# EAGLE board SparkFun WiFi Shield - DA16200-Panel (EAGLE 9.6.2), part 1 of 3
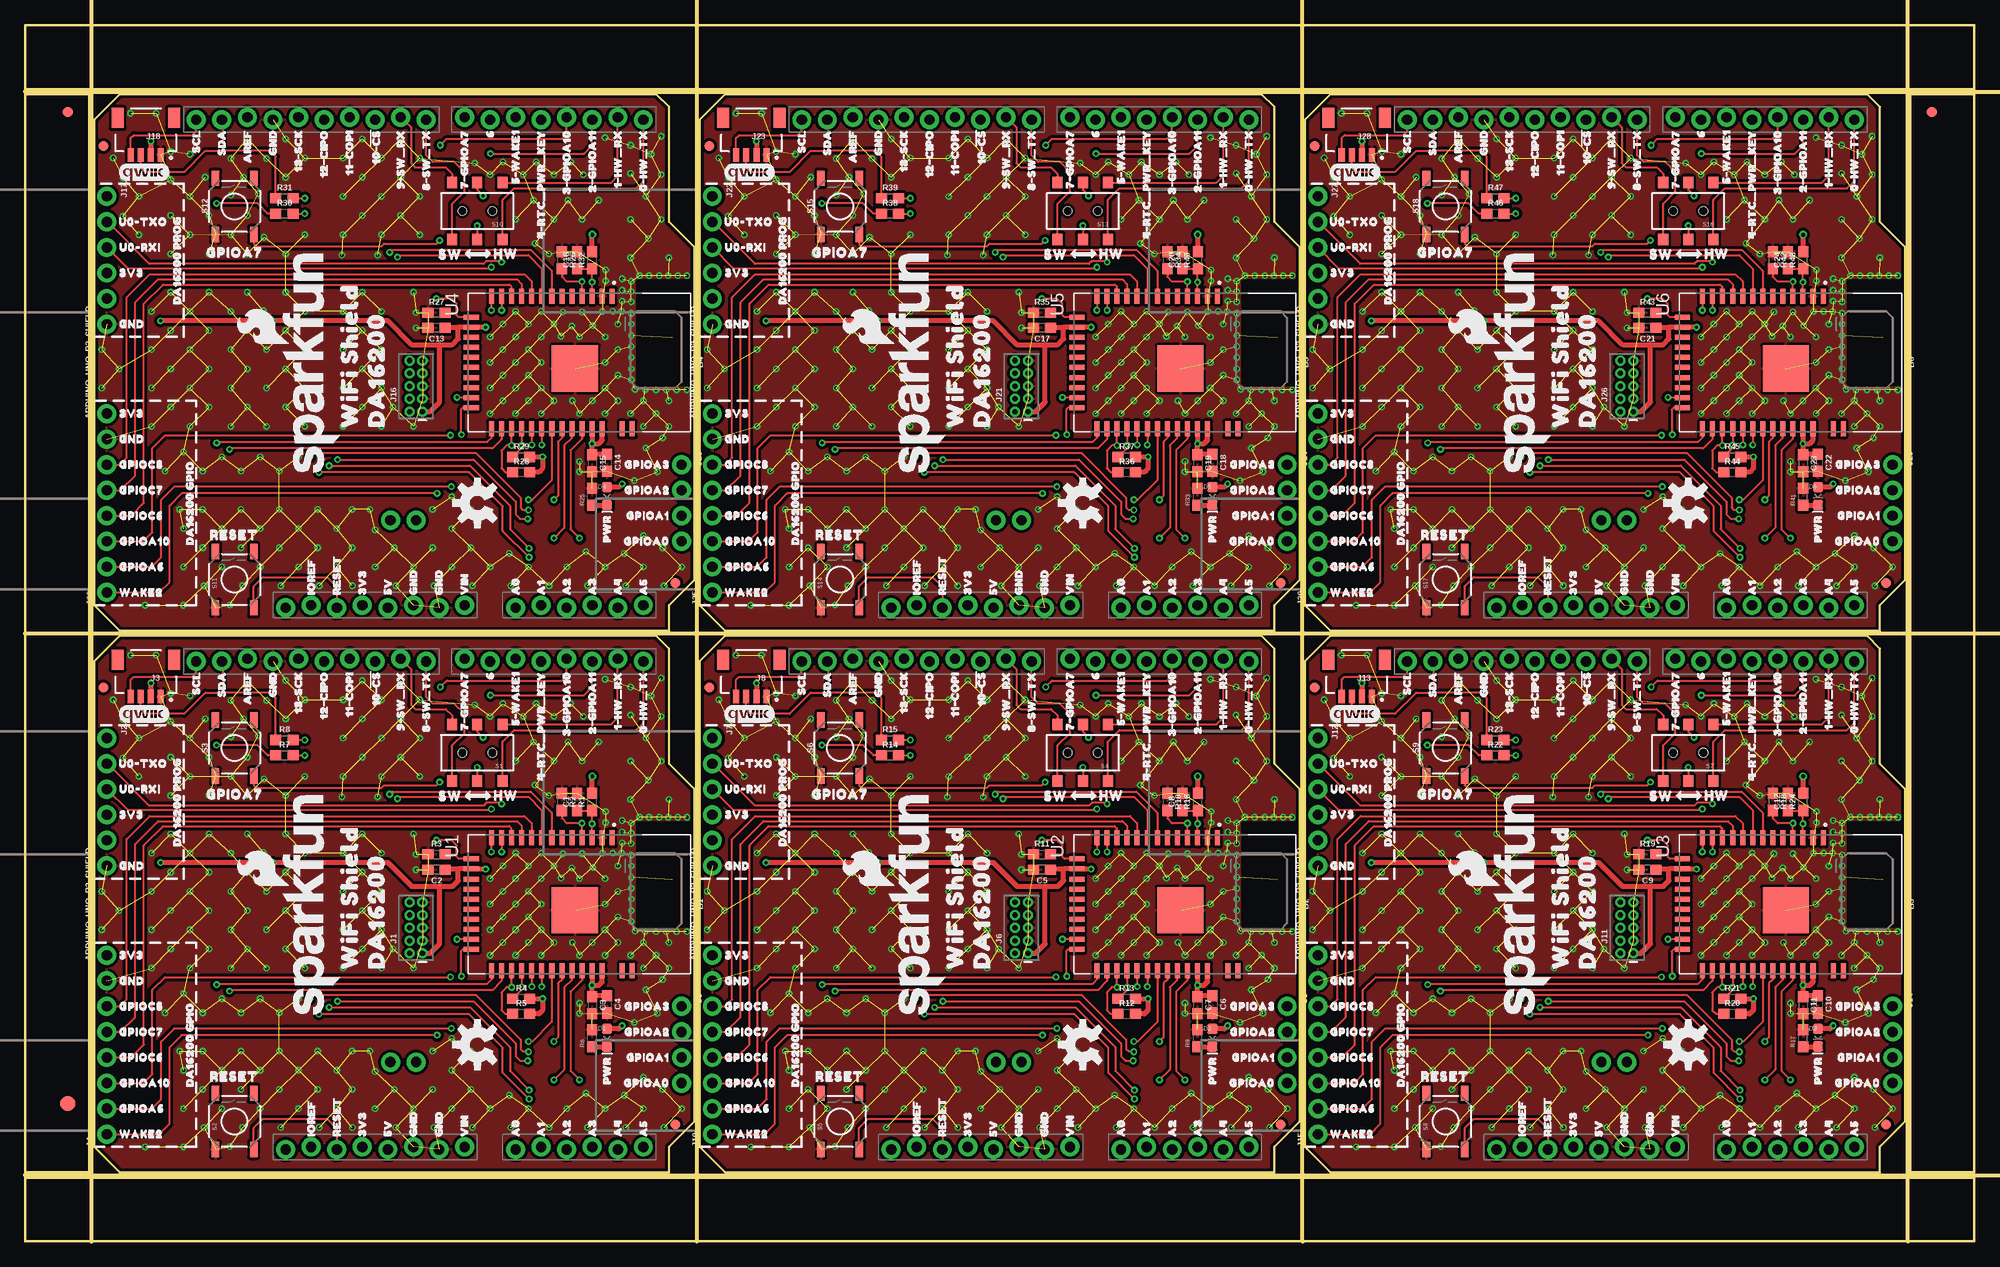
[diagram p0: board, top side]
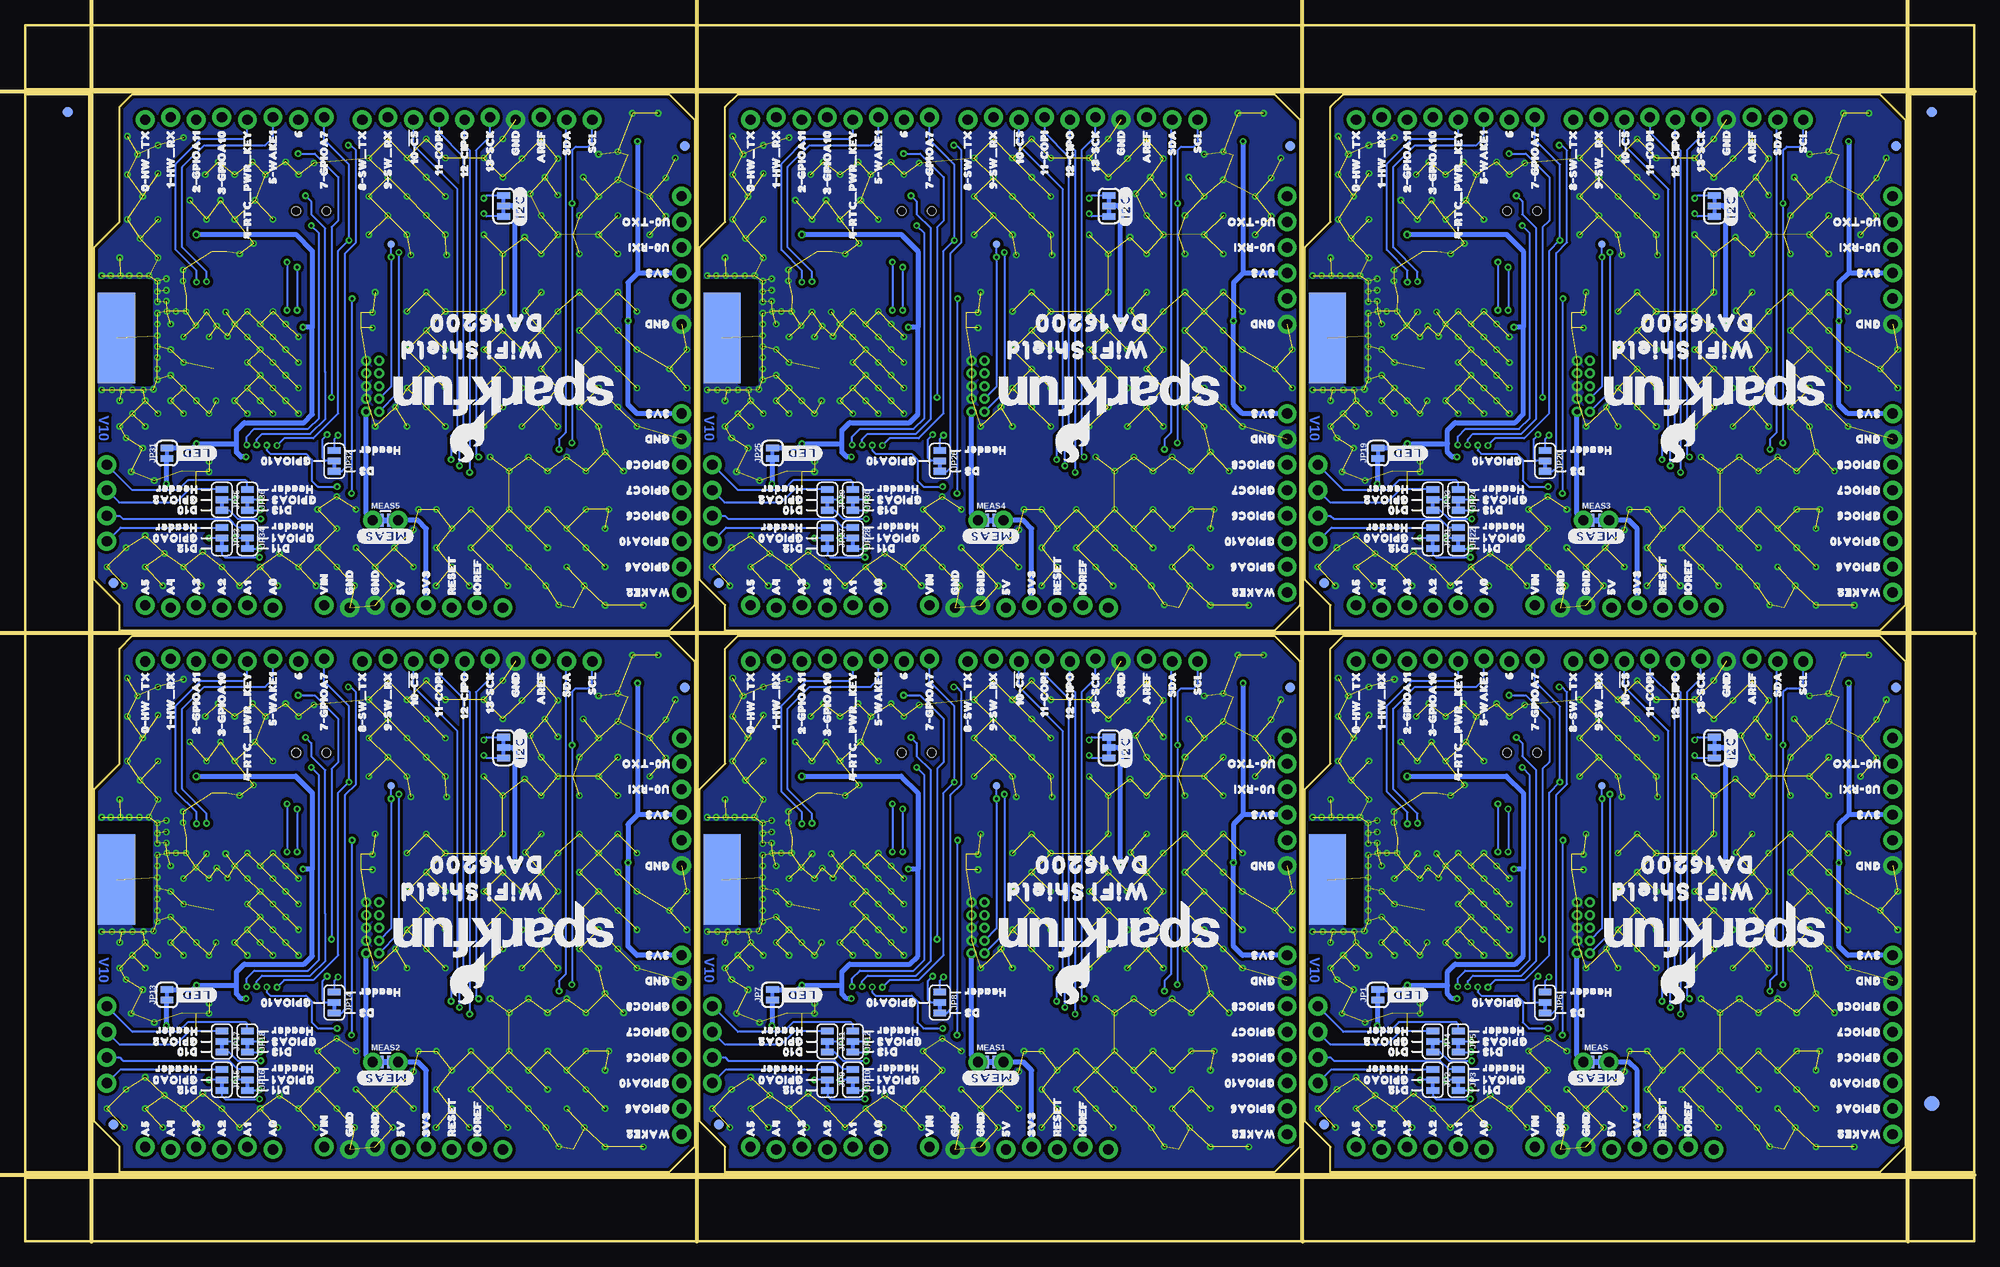
[diagram p1: board, bottom side, seen from below]

Size 193.8 x 120.9 mm. Coordinates in mm from the lower left corner, seen from the top.
Outline: 6.86,57.66 6.86,9.4 9.4,6.86 64.01,6.86 64.01,9.4 66.55,11.94 66.55,44.96 64.01,47.5 64.01,58.93 62.74,60.2 9.4,60.2 6.86,57.66
Outline: 67.06,57.66 67.06,9.4 69.6,6.86 124.21,6.86 124.21,9.4 126.75,11.94 126.75,44.96 124.21,47.5 124.21,58.93 122.94,60.2 69.6,60.2 67.06,57.66
Outline: 127.25,57.66 127.25,9.4 129.79,6.86 184.4,6.86 184.4,9.4 186.94,11.94 186.94,44.96 184.4,47.5 184.4,58.93 183.13,60.2 129.79,60.2 127.25,57.66
Outline: 6.86,111.51 6.86,63.25 9.4,60.71 64.01,60.71 64.01,63.25 66.55,65.79 66.55,98.81 64.01,101.35 64.01,112.78 62.74,114.05 9.4,114.05 6.86,111.51
Outline: 67.06,111.51 67.06,63.25 69.6,60.71 124.21,60.71 124.21,63.25 126.75,65.79 126.75,98.81 124.21,101.35 124.21,112.78 122.94,114.05 69.6,114.05 67.06,111.51
Outline: 127.25,111.51 127.25,63.25 129.79,60.71 184.4,60.71 184.4,63.25 186.94,65.79 186.94,98.81 184.4,101.35 184.4,112.78 183.13,114.05 129.79,114.05 127.25,111.51
Outline: 0,6.35 193.8,6.35 193.8,0 0,0 0,6.35
Outline: 187.45,114.05 193.8,114.05 193.8,6.86 187.45,6.86 187.45,114.05
Outline: 0,120.9 193.8,120.9 193.8,114.55 0,114.55 0,120.9
Outline: 0,114.05 6.35,114.05 6.35,6.86 0,6.86 0,114.05
Copper layers (1*16): Top 0.035mm / dielectric 1.5mm / Bottom 0.035mm
Design rules "SparkFun WiFi Shield - DA16200": minimum track width 7mil, minimum drill 0.3mm, track to track 7mil, track to pad 7mil, pad to pad 7mil, via to via 7mil, smd to smd 7mil, copper to edge 7mil, drill to drill 7mil, minimum pad ring 7mil, minimum via ring 7mil, stop-mask expansion 3mil, vias tented up to drill 25mil, thermal gap 10mil
Milling: 7 lines

## Footprints (pad centres in the part's own frame; a part is rotated, then mirrored left to right if it is on the bottom)
UNO_R3_SHIELD_NOLABELS_LOCK = drill 1.016 pad 1.88: 3.3V 24.13,-3.81; 5V 24.384,-1.27; A0 24.384,11.43; A1 24.13,13.97; A2 24.384,16.51; A3 24.13,19.05; A4 24.384,21.59; A5 24.13,24.13; AREF -24.384,-15.24; D2 -24.13,19.05; D3 -24.384,16.51; D4 -24.13,13.97; D5 -24.384,11.43; D6 -24.13,8.89; D7 -24.384,6.35; D8 -24.13,2.54; D9 -24.384,0; D10 -24.13,-2.54; D11 -24.384,-5.08; D12 -24.13,-7.62; D13 -24.384,-10.16; GND@0 24.13,1.27; GND@1 24.384,3.81; GND@2 -24.13,-12.7; IOREF 24.13,-8.89; NC 24.384,-11.43; RES 24.384,-6.35; RX -24.13,24.13; SCL -24.13,-20.32; SDA -24.13,-17.78; TX -24.384,21.59; VIN 24.13,6.35
0603 = smd 1.1 x 1: 1 -0.85,0; 2 0.85,0
LED-0603 = smd 1 x 1: A -0.877,0; C 0.877,0
FIDUCIAL-1X2 = smd 1 x 1: 1 0,0
FIDUCIAL-1.5X3 = smd 1.5 x 1.5: 1 0,0
SMT-JUMPER_3_2-NC_TRACE_SILK = smd 0.66 x 1.27: 1 -1.041,0; 2 0,0; 3 1.041,0
2X5-PTH-1.27MM-NO_SILK = drill 0.508 pad 1: 1 -2.54,-0.635; 2 -2.54,0.635; 3 -1.27,-0.635; 4 -1.27,0.635; 5 0,-0.635; 6 0,0.635; 7 1.27,-0.635; 8 1.27,0.635; 9 2.54,-0.635; 10 2.54,0.635
1X06_NO_SILK = drill 1.016 pad 1.88: 1 0,0; 2 2.54,0; 3 5.08,0; 4 7.62,0; 5 10.16,0; 6 12.7,0
JST04_1MM_RA = smd 0.6 x 1.35: 1 -1.5,0; 2 -0.5,0; 3 0.5,0; 4 1.5,0 | smd 1.2 x 2: NC1 2.8,-3.675; NC2 -2.8,-3.675
1X08_NO_SILK = drill 1.016 pad 1.88: 1 0,0; 2 2.54,0; 3 5.08,0; 4 7.62,0; 5 10.16,0; 6 12.7,0; 7 15.24,0; 8 17.78,0
1X04_NO_SILK = drill 1.016 pad 1.88: 1 0,0; 2 2.54,0; 3 5.08,0; 4 7.62,0
SMT-JUMPER_2_NC_TRACE_SILK = smd 0.66 x 1.27: 1 -0.521,0; 2 0.521,0
SMT-JUMPER_3_1-NC_TRACE_SILK = smd 0.66 x 1.27: 1 -1.041,0; 2 0,0; 3 1.041,0
COMBO-JUMPER_2_NC_TRACE = smd 0.635 x 1.27: 1 -0.508,0; 2 0.508,0 | drill 1.016 pad 1.88: 3 -1.27,0; 4 1.27,0
SWITCH_DPDT_SMD_AYZ0202 = smd 1 x 1.15: 1 -2.5,2.825; 2 0,2.825; 3 2.5,2.825; 4 -2.5,-2.825; 5 0,-2.825; 6 2.5,-2.825 | hole 0.85: 1.5,0; -1.5,0
TACTILE_SWITCH_SMD_5.2MM = smd 1.524 x 0.762: 1 -2.794,1.905; 2 2.794,1.905; 3 -2.794,-1.905; 4 2.794,-1.905
PAD.03X.03 = smd 0.762 x 0.762: 1 0,0
XCVR_DA16200MOD-AAC4WA32 = smd 1.5 x 0.5: 1 -6.6,3.25; 2 -6.6,2.25; 3 -6.6,1.25; 4 -6.6,0.25; 5 -6.6,-0.75; 6 -6.6,-1.75; 7 -6.6,-2.75; 8 -6.6,-3.75; 9 -6.6,-4.75; 10 -6.6,-5.75; 11 -6.6,-6.75; 12 -6.6,-7.75; 13 -6.6,-8.75; 24 6.6,-8.75; 25 6.6,-7.75; 26 6.6,-6.75; 27 6.6,-5.75; 28 6.6,-4.75; 29 6.6,-3.75; 30 6.6,-2.75; 31 6.6,-1.75; 32 6.6,-0.75; 33 6.6,0.25; 34 6.6,1.25; 35 6.6,2.25; 36 6.6,4.25; 37 6.6,5.25 | smd 0.5 x 1.5: 14 -4.5,-10.75; 15 -3.5,-10.75; 16 -2.5,-10.75; 17 -1.5,-10.75; 18 -0.5,-10.75; 19 0.5,-10.75; 20 1.5,-10.75; 21 2.5,-10.75; 22 3.5,-10.75; 23 4.5,-10.75 | smd 9 x 3.7 bottom: ANT_GND -2.45,9.2 | smd 4.6 x 4.6: GND 0.61,-0.45

## Placement (x,y rotation side)
B1  ARDUINO_UNO_R3_SHIELD  [UNO_R3_SHIELD_NOLABELS_LOCK]  37.34,33.53 270 top
B2  ARDUINO_UNO_R3_SHIELD  [UNO_R3_SHIELD_NOLABELS_LOCK]  97.54,33.53 270 top
B3  ARDUINO_UNO_R3_SHIELD  [UNO_R3_SHIELD_NOLABELS_LOCK]  157.73,33.53 270 top
B4  ARDUINO_UNO_R3_SHIELD  [UNO_R3_SHIELD_NOLABELS_LOCK]  37.34,87.38 270 top
B5  ARDUINO_UNO_R3_SHIELD  [UNO_R3_SHIELD_NOLABELS_LOCK]  97.54,87.38 270 top
B6  ARDUINO_UNO_R3_SHIELD  [UNO_R3_SHIELD_NOLABELS_LOCK]  157.73,87.38 270 top
C1  DNP  [0603]  54.86,43.69 90 top
C2  1uF  [0603]  40.89,36.96 180 top
C3  1uF  [0603]  56.38,23.5 270 top
C4  10uF  [0603]  57.85,23.56 270 top
C5  1uF  [0603]  101.09,36.96 180 top
C6  10uF  [0603]  118.05,23.56 270 top
C7  1uF  [0603]  116.57,23.5 270 top
C8  DNP  [0603]  115.06,43.69 90 top
C9  1uF  [0603]  161.29,36.96 180 top
C10  10uF  [0603]  178.24,23.56 270 top
C11  1uF  [0603]  176.77,23.5 270 top
C12  DNP  [0603]  175.26,43.69 90 top
C13  1uF  [0603]  40.89,90.81 180 top
C14  10uF  [0603]  57.85,77.41 270 top
C15  1uF  [0603]  56.38,77.34 270 top
C16  DNP  [0603]  54.86,97.54 90 top
C17  1uF  [0603]  101.09,90.81 180 top
C18  10uF  [0603]  118.05,77.41 270 top
C19  1uF  [0603]  116.57,77.34 270 top
C20  DNP  [0603]  115.06,97.54 90 top
C21  1uF  [0603]  161.29,90.81 180 top
C22  10uF  [0603]  178.24,77.41 270 top
C23  1uF  [0603]  176.77,77.34 270 top
C24  DNP  [0603]  175.26,97.54 90 top
D1  RED  [LED-0603]  57.85,20.26 270 top
D2  RED  [LED-0603]  118.05,20.26 270 top
D3  RED  [LED-0603]  178.24,20.26 270 top
D4  RED  [LED-0603]  57.85,74.1 270 top
D5  RED  [LED-0603]  118.05,74.1 270 top
D6  RED  [LED-0603]  178.24,74.1 270 top
E$1  [FIDUCIAL-1X2]  4.23,112.27 0 top
E$2  [FIDUCIAL-1X2]  4.23,112.27 0 bottom
E$3  [FIDUCIAL-1X2]  189.57,112.27 0 top
E$4  [FIDUCIAL-1X2]  189.57,112.27 0 bottom
E$5  [FIDUCIAL-1.5X3]  4.23,13.72 0 top
E$6  [FIDUCIAL-1.5X3]  4.23,13.72 0 bottom
FD1  FIDUCIAL1X2  [FIDUCIAL-1X2]  7.81,55.05 0 top
FD2  FIDUCIAL1X2  [FIDUCIAL-1X2]  7.81,55.05 0 bottom
FD3  FIDUCIAL1X2  [FIDUCIAL-1X2]  64.64,11.62 0 top
FD4  FIDUCIAL1X2  [FIDUCIAL-1X2]  64.64,11.62 0 bottom
FD5  FIDUCIAL1X2  [FIDUCIAL-1X2]  68.01,55.05 0 top
FD6  FIDUCIAL1X2  [FIDUCIAL-1X2]  68.01,55.05 0 bottom
FD7  FIDUCIAL1X2  [FIDUCIAL-1X2]  124.84,11.62 0 top
FD8  FIDUCIAL1X2  [FIDUCIAL-1X2]  124.84,11.62 0 bottom
FD9  FIDUCIAL1X2  [FIDUCIAL-1X2]  128.21,55.05 0 top
FD10  FIDUCIAL1X2  [FIDUCIAL-1X2]  128.21,55.05 0 bottom
FD11  FIDUCIAL1X2  [FIDUCIAL-1X2]  185.04,11.62 0 top
FD12  FIDUCIAL1X2  [FIDUCIAL-1X2]  185.04,11.62 0 bottom
FD13  FIDUCIAL1X2  [FIDUCIAL-1X2]  7.81,108.9 0 top
FD14  FIDUCIAL1X2  [FIDUCIAL-1X2]  7.81,108.9 0 bottom
FD15  FIDUCIAL1X2  [FIDUCIAL-1X2]  64.64,65.47 0 top
FD16  FIDUCIAL1X2  [FIDUCIAL-1X2]  64.64,65.47 0 bottom
FD17  FIDUCIAL1X2  [FIDUCIAL-1X2]  68.01,108.9 0 top
FD18  FIDUCIAL1X2  [FIDUCIAL-1X2]  68.01,108.9 0 bottom
FD19  FIDUCIAL1X2  [FIDUCIAL-1X2]  124.84,65.47 0 top
FD20  FIDUCIAL1X2  [FIDUCIAL-1X2]  124.84,65.47 0 bottom
FD21  FIDUCIAL1X2  [FIDUCIAL-1X2]  128.21,108.9 0 top
FD22  FIDUCIAL1X2  [FIDUCIAL-1X2]  128.21,108.9 0 bottom
FD23  FIDUCIAL1X2  [FIDUCIAL-1X2]  185.04,65.47 0 top
FD24  FIDUCIAL1X2  [FIDUCIAL-1X2]  185.04,65.47 0 bottom
I2C  [SMT-JUMPER_3_2-NC_TRACE_SILK]  25.84,49.09 270 bottom
I2C1  [SMT-JUMPER_3_2-NC_TRACE_SILK]  86.04,49.09 270 bottom
I2C2  [SMT-JUMPER_3_2-NC_TRACE_SILK]  146.24,49.09 270 bottom
I2C3  [SMT-JUMPER_3_2-NC_TRACE_SILK]  25.84,102.93 270 bottom
I2C4  [SMT-JUMPER_3_2-NC_TRACE_SILK]  86.04,102.93 270 bottom
I2C5  [SMT-JUMPER_3_2-NC_TRACE_SILK]  146.24,102.93 270 bottom
J1  CORTEX_JTAG_DEBUG  [2X5-PTH-1.27MM-NO_SILK]  38.86,31.18 90 top
J2  [1X06_NO_SILK]  8.13,50.04 270 top
J3  QWIIC_RA  [JST04_1MM_RA]  12,54.17 180 top
J4  [1X08_NO_SILK]  8.13,10.67 90 top
J5  [1X04_NO_SILK]  65.28,23.37 270 top
J6  CORTEX_JTAG_DEBUG  [2X5-PTH-1.27MM-NO_SILK]  99.06,31.18 90 top
J7  [1X06_NO_SILK]  68.33,50.04 270 top
J8  QWIIC_RA  [JST04_1MM_RA]  72.2,54.17 180 top
J9  [1X04_NO_SILK]  125.48,23.37 270 top
J10  [1X08_NO_SILK]  68.33,10.67 90 top
J11  CORTEX_JTAG_DEBUG  [2X5-PTH-1.27MM-NO_SILK]  159.26,31.18 90 top
J12  [1X06_NO_SILK]  128.52,50.04 270 top
J13  QWIIC_RA  [JST04_1MM_RA]  132.4,54.17 180 top
J14  [1X04_NO_SILK]  185.67,23.37 270 top
J15  [1X08_NO_SILK]  128.52,10.67 90 top
J16  CORTEX_JTAG_DEBUG  [2X5-PTH-1.27MM-NO_SILK]  38.86,85.03 90 top
J17  [1X06_NO_SILK]  8.13,103.89 270 top
J18  QWIIC_RA  [JST04_1MM_RA]  12,108.01 180 top
J19  [1X04_NO_SILK]  65.28,77.22 270 top
J20  [1X08_NO_SILK]  8.13,64.52 90 top
J21  CORTEX_JTAG_DEBUG  [2X5-PTH-1.27MM-NO_SILK]  99.06,85.03 90 top
J22  [1X06_NO_SILK]  68.33,103.89 270 top
J23  QWIIC_RA  [JST04_1MM_RA]  72.2,108.01 180 top
J24  [1X04_NO_SILK]  125.48,77.22 270 top
J25  [1X08_NO_SILK]  68.33,64.52 90 top
J26  CORTEX_JTAG_DEBUG  [2X5-PTH-1.27MM-NO_SILK]  159.26,85.03 90 top
J27  [1X06_NO_SILK]  128.52,103.89 270 top
J28  QWIIC_RA  [JST04_1MM_RA]  132.4,108.01 180 top
J29  [1X04_NO_SILK]  185.67,77.22 270 top
J30  [1X08_NO_SILK]  128.52,64.52 90 top
JP1  [SMT-JUMPER_2_NC_TRACE_SILK]  59.3,24.51 90 bottom
JP2  [SMT-JUMPER_3_1-NC_TRACE_SILK]  53.85,16.07 270 bottom
JP3  [SMT-JUMPER_3_1-NC_TRACE_SILK]  51.31,16.07 270 bottom
JP4  [SMT-JUMPER_3_1-NC_TRACE_SILK]  53.85,19.88 270 bottom
JP5  [SMT-JUMPER_3_1-NC_TRACE_SILK]  51.31,19.88 270 bottom
JP6  [SMT-JUMPER_3_1-NC_TRACE_SILK]  42.67,23.75 270 bottom
JP7  [SMT-JUMPER_2_NC_TRACE_SILK]  119.49,24.51 90 bottom
JP8  [SMT-JUMPER_3_1-NC_TRACE_SILK]  102.87,23.75 270 bottom
JP9  [SMT-JUMPER_3_1-NC_TRACE_SILK]  114.05,16.07 270 bottom
JP10  [SMT-JUMPER_3_1-NC_TRACE_SILK]  111.51,16.07 270 bottom
JP11  [SMT-JUMPER_3_1-NC_TRACE_SILK]  114.05,19.88 270 bottom
JP12  [SMT-JUMPER_3_1-NC_TRACE_SILK]  111.51,19.88 270 bottom
JP13  [SMT-JUMPER_2_NC_TRACE_SILK]  179.69,24.51 90 bottom
JP14  [SMT-JUMPER_3_1-NC_TRACE_SILK]  163.07,23.75 270 bottom
JP15  [SMT-JUMPER_3_1-NC_TRACE_SILK]  174.24,16.07 270 bottom
JP16  [SMT-JUMPER_3_1-NC_TRACE_SILK]  171.7,16.07 270 bottom
JP17  [SMT-JUMPER_3_1-NC_TRACE_SILK]  174.24,19.88 270 bottom
JP18  [SMT-JUMPER_3_1-NC_TRACE_SILK]  171.7,19.88 270 bottom
JP19  [SMT-JUMPER_2_NC_TRACE_SILK]  59.3,78.36 90 bottom
JP20  [SMT-JUMPER_3_1-NC_TRACE_SILK]  42.67,77.6 270 bottom
JP21  [SMT-JUMPER_3_1-NC_TRACE_SILK]  53.85,69.91 270 bottom
JP22  [SMT-JUMPER_3_1-NC_TRACE_SILK]  51.31,69.91 270 bottom
JP23  [SMT-JUMPER_3_1-NC_TRACE_SILK]  53.85,73.72 270 bottom
JP24  [SMT-JUMPER_3_1-NC_TRACE_SILK]  51.31,73.72 270 bottom
JP25  [SMT-JUMPER_2_NC_TRACE_SILK]  119.49,78.36 90 bottom
JP26  [SMT-JUMPER_3_1-NC_TRACE_SILK]  102.87,77.6 270 bottom
JP27  [SMT-JUMPER_3_1-NC_TRACE_SILK]  114.05,69.91 270 bottom
JP28  [SMT-JUMPER_3_1-NC_TRACE_SILK]  111.51,69.91 270 bottom
JP29  [SMT-JUMPER_3_1-NC_TRACE_SILK]  114.05,73.72 270 bottom
JP30  [SMT-JUMPER_3_1-NC_TRACE_SILK]  111.51,73.72 270 bottom
JP31  [SMT-JUMPER_2_NC_TRACE_SILK]  179.69,78.36 90 bottom
JP32  [SMT-JUMPER_3_1-NC_TRACE_SILK]  163.07,77.6 270 bottom
JP33  [SMT-JUMPER_3_1-NC_TRACE_SILK]  174.24,69.91 270 bottom
JP34  [SMT-JUMPER_3_1-NC_TRACE_SILK]  171.7,69.91 270 bottom
JP35  [SMT-JUMPER_3_1-NC_TRACE_SILK]  174.24,73.72 270 bottom
JP36  [SMT-JUMPER_3_1-NC_TRACE_SILK]  171.7,73.72 270 bottom
LOGO1  SFE_LOGO_NAME_FLAME.2_INCH  [SFE_LOGO_NAME_FLAME_.2]  28.45,33.53 90 top
LOGO2  OSHW-LOGOM  [OSHW-LOGO-M]  44.96,19.56 90 top
LOGO3  SFE_LOGO_NAME_FLAME.2_INCH  [SFE_LOGO_NAME_FLAME_.2]  25.91,30.99 180 bottom
LOGO4  QWIIC_LOGO_5MM  [QWIIC_5MM]  11.81,52.45 0 top
LOGO5  SFE_LOGO_NAME_FLAME.2_INCH  [SFE_LOGO_NAME_FLAME_.2]  88.65,33.53 90 top
LOGO6  OSHW-LOGOM  [OSHW-LOGO-M]  105.16,19.56 90 top
LOGO7  SFE_LOGO_NAME_FLAME.2_INCH  [SFE_LOGO_NAME_FLAME_.2]  86.11,30.99 180 bottom
LOGO8  QWIIC_LOGO_5MM  [QWIIC_5MM]  72.01,52.45 0 top
LOGO9  SFE_LOGO_NAME_FLAME.2_INCH  [SFE_LOGO_NAME_FLAME_.2]  148.84,33.53 90 top
LOGO10  OSHW-LOGOM  [OSHW-LOGO-M]  165.35,19.56 90 top
LOGO11  SFE_LOGO_NAME_FLAME.2_INCH  [SFE_LOGO_NAME_FLAME_.2]  146.3,30.99 180 bottom
LOGO12  QWIIC_LOGO_5MM  [QWIIC_5MM]  132.21,52.45 0 top
LOGO13  SFE_LOGO_NAME_FLAME.2_INCH  [SFE_LOGO_NAME_FLAME_.2]  28.45,87.38 90 top
LOGO14  OSHW-LOGOM  [OSHW-LOGO-M]  44.96,73.41 90 top
LOGO15  SFE_LOGO_NAME_FLAME.2_INCH  [SFE_LOGO_NAME_FLAME_.2]  25.91,84.84 180 bottom
LOGO16  QWIIC_LOGO_5MM  [QWIIC_5MM]  11.81,106.3 0 top
LOGO17  SFE_LOGO_NAME_FLAME.2_INCH  [SFE_LOGO_NAME_FLAME_.2]  88.65,87.38 90 top
LOGO18  OSHW-LOGOM  [OSHW-LOGO-M]  105.16,73.41 90 top
LOGO19  SFE_LOGO_NAME_FLAME.2_INCH  [SFE_LOGO_NAME_FLAME_.2]  86.11,84.84 180 bottom
LOGO20  QWIIC_LOGO_5MM  [QWIIC_5MM]  72.01,106.3 0 top
LOGO21  SFE_LOGO_NAME_FLAME.2_INCH  [SFE_LOGO_NAME_FLAME_.2]  148.84,87.38 90 top
LOGO22  OSHW-LOGOM  [OSHW-LOGO-M]  165.35,73.41 90 top
LOGO23  SFE_LOGO_NAME_FLAME.2_INCH  [SFE_LOGO_NAME_FLAME_.2]  146.3,84.84 180 bottom
LOGO24  QWIIC_LOGO_5MM  [QWIIC_5MM]  132.21,106.3 0 top
MEAS  [COMBO-JUMPER_2_NC_TRACE]  37.59,17.83 0 bottom
MEAS1  [COMBO-JUMPER_2_NC_TRACE]  97.79,17.83 0 bottom
MEAS2  [COMBO-JUMPER_2_NC_TRACE]  157.99,17.83 0 bottom
MEAS3  [COMBO-JUMPER_2_NC_TRACE]  37.59,71.68 0 bottom
MEAS4  [COMBO-JUMPER_2_NC_TRACE]  97.79,71.68 0 bottom
MEAS5  [COMBO-JUMPER_2_NC_TRACE]  157.99,71.68 0 bottom
R1  DNP  [0603]  56.39,43.69 90 top
R2  4.7k  [0603]  53.37,43.69 270 top
R3  4.7k  [0603]  40.89,38.48 0 top
R4  4.7k  [0603]  49.33,24.13 0 top
R5  4.7k  [0603]  49.33,22.63 0 top
R6  200  [0603]  56.38,20.19 90 top
R7  4.7k  [0603]  25.78,48.32 0 top
R8  4.7k  [0603]  25.78,49.85 0 top
R9  200  [0603]  116.57,20.19 90 top
R10  4.7k  [0603]  113.56,43.69 270 top
R11  4.7k  [0603]  101.09,38.48 0 top
R12  4.7k  [0603]  109.52,22.63 0 top
R13  4.7k  [0603]  109.52,24.13 0 top
R14  4.7k  [0603]  85.98,48.32 0 top
R15  4.7k  [0603]  85.98,49.85 0 top
R16  DNP  [0603]  116.59,43.69 90 top
R17  200  [0603]  176.77,20.19 90 top
R18  4.7k  [0603]  173.76,43.69 270 top
R19  4.7k  [0603]  161.29,38.48 0 top
R20  4.7k  [0603]  169.72,22.63 0 top
R21  4.7k  [0603]  169.72,24.13 0 top
R22  4.7k  [0603]  146.18,48.32 0 top
R23  4.7k  [0603]  146.18,49.85 0 top
R24  DNP  [0603]  176.78,43.69 90 top
R25  200  [0603]  56.38,74.04 90 top
R26  4.7k  [0603]  53.37,97.54 270 top
R27  4.7k  [0603]  40.89,92.33 0 top
R28  4.7k  [0603]  49.33,76.48 0 top
R29  4.7k  [0603]  49.33,77.98 0 top
R30  4.7k  [0603]  25.78,102.17 0 top
R31  4.7k  [0603]  25.78,103.7 0 top
R32  DNP  [0603]  56.39,97.54 90 top
R33  200  [0603]  116.57,74.04 90 top
R34  4.7k  [0603]  113.56,97.54 270 top
R35  4.7k  [0603]  101.09,92.33 0 top
R36  4.7k  [0603]  109.52,76.48 0 top
R37  4.7k  [0603]  109.52,77.98 0 top
R38  4.7k  [0603]  85.98,102.17 0 top
R39  4.7k  [0603]  85.98,103.7 0 top
R40  DNP  [0603]  116.59,97.54 90 top
R41  200  [0603]  176.77,74.04 90 top
R42  4.7k  [0603]  173.76,97.54 270 top
R43  4.7k  [0603]  161.29,92.33 0 top
R44  4.7k  [0603]  169.72,76.48 0 top
R45  4.7k  [0603]  169.72,77.98 0 top
R46  4.7k  [0603]  146.18,102.17 0 top
R47  4.7k  [0603]  146.18,103.7 0 top
R48  DNP  [0603]  176.78,97.54 90 top
S1  DPDT  [SWITCH_DPDT_SMD_AYZ0202]  44.96,48.58 180 top
S2  Reset  [TACTILE_SWITCH_SMD_5.2MM]  20.83,11.94 90 top
S3  [TACTILE_SWITCH_SMD_5.2MM]  20.83,49.05 90 top
S4  DPDT  [SWITCH_DPDT_SMD_AYZ0202]  105.16,48.58 180 top
S5  Reset  [TACTILE_SWITCH_SMD_5.2MM]  81.03,11.94 90 top
S6  [TACTILE_SWITCH_SMD_5.2MM]  81.03,49.05 90 top
S7  DPDT  [SWITCH_DPDT_SMD_AYZ0202]  165.35,48.58 180 top
S8  Reset  [TACTILE_SWITCH_SMD_5.2MM]  141.22,11.94 90 top
S9  [TACTILE_SWITCH_SMD_5.2MM]  141.22,49.05 90 top
S10  DPDT  [SWITCH_DPDT_SMD_AYZ0202]  44.96,102.43 180 top
S11  Reset  [TACTILE_SWITCH_SMD_5.2MM]  20.83,65.79 90 top
S12  [TACTILE_SWITCH_SMD_5.2MM]  20.83,102.9 90 top
S13  DPDT  [SWITCH_DPDT_SMD_AYZ0202]  105.16,102.43 180 top
S14  Reset  [TACTILE_SWITCH_SMD_5.2MM]  81.03,65.79 90 top
S15  [TACTILE_SWITCH_SMD_5.2MM]  81.03,102.9 90 top
S16  DPDT  [SWITCH_DPDT_SMD_AYZ0202]  165.35,102.43 180 top
S17  Reset  [TACTILE_SWITCH_SMD_5.2MM]  141.22,65.79 90 top
S18  [TACTILE_SWITCH_SMD_5.2MM]  141.22,102.9 90 top
TP1  [PAD.03X.03]  37.02,45.28 0 bottom
TP2  [PAD.03X.03]  97.22,45.28 0 bottom
TP3  [PAD.03X.03]  157.42,45.28 0 bottom
TP4  [PAD.03X.03]  37.02,99.12 0 bottom
TP5  [PAD.03X.03]  97.22,99.12 0 bottom
TP6  [PAD.03X.03]  157.42,99.12 0 bottom
U1  DA16200MOD  [XCVR_DA16200MOD-AAC4WA32]  55.12,33.53 270 top
U2  DA16200MOD  [XCVR_DA16200MOD-AAC4WA32]  115.32,33.53 270 top
U3  DA16200MOD  [XCVR_DA16200MOD-AAC4WA32]  175.51,33.53 270 top
U4  DA16200MOD  [XCVR_DA16200MOD-AAC4WA32]  55.12,87.38 270 top
U5  DA16200MOD  [XCVR_DA16200MOD-AAC4WA32]  115.32,87.38 270 top
U6  DA16200MOD  [XCVR_DA16200MOD-AAC4WA32]  175.51,87.38 270 top
U$1  [IOREF0]  28.45,9.91 90 top
U$2  [RESET0]  30.99,9.91 90 top
U$3  [3V30]  33.53,9.91 90 top
U$4  [5V0]  36.07,9.91 90 top
U$5  [GND0]  38.61,9.91 90 top
U$6  [GND0]  41.15,9.91 90 top
U$7  [VIN0]  43.69,9.91 90 top
U$8  [A00]  48.77,9.91 90 top
U$9  [A10]  51.31,9.91 90 top
U$10  [A20]  53.85,9.91 90 top
U$11  [A30]  56.39,9.91 90 top
U$12  [A40]  58.93,9.91 90 top
U$13  [A50]  61.47,9.91 90 top
U$14  [0#HW_TX0]  61.47,57.15 90 top
U$15  [1#HW_RX0]  58.93,57.15 90 top
U$16  [IOREF0]  28.45,9.91 90 bottom
U$17  [GPIOA60]  8.83,13.21 0 top
U$18  [4#RTC_PWR_KEY0]  51.31,57.15 90 top
U$19  [RESET0]  30.99,9.91 90 bottom
U$20  [8#SW_TX0]  39.88,57.15 90 top
U$21  [7#GPIOA70]  43.69,57.15 90 top
U$22  [IOREF0]  88.65,9.91 90 top
U$23  [5#WAKE10]  48.77,57.21 90 top
U$24  [10##CS#0]  34.8,57.15 90 top
U$25  [11#COPI0]  32.26,57.15 90 top
U$26  [12#CIPO0]  29.72,57.15 90 top
U$27  [13#SCK0]  27.18,57.15 90 top
U$28  [GND0]  24.64,53.59 90 top
U$29  [AREF0]  22.1,57.15 90 top
U$30  [SDA0]  19.56,57.15 90 top
U$31  [SCL0]  17.02,57.15 90 top
U$32  [9#SW_RX0]  37.34,57.15 90 top
U$33  [5#WAKE10]  48.77,57.21 90 bottom
U$34  [GPIOA70]  20.83,44.45 0 top
U$35  [WAKE20]  8.83,10.67 0 top
U$36  [RESET_0]  20.95,16.38 0 top
U$37  [3V30]  8.83,42.42 0 top
U$38  [60]  46.23,57.15 90 top
U$39  [3V30]  33.53,9.91 90 bottom
U$40  [GND0]  8.83,25.91 0 top
U$41  [3V30]  8.83,28.45 0 top
U$42  [HW0]  49.72,44.32 0 top
U$43  [SW0]  44.13,44.26 0 top
U$44  [GPIOC80]  8.83,23.37 0 top
U$45  [GPIOC70]  8.83,20.83 0 top
U$46  [GPIOC60]  8.83,18.29 0 top
U$47  [GPIOA100]  14.99,15.75 0 top
U$48  [WAKE20]  8.83,10.67 180 bottom
U$49  [#I2C#0]  24.19,49.02 90 bottom
U$50  [2#GPIOA110]  56.39,57.15 90 bottom
U$51  [3#GPIOA100]  53.85,57.15 90 top
U$52  [GND0]  8.83,37.34 0 top
U$53  [U0#TXO0]  8.76,47.5 0 top
U$54  [U0#RXI0]  8.83,44.96 0 top
U$55  [5V0]  36.07,9.91 90 bottom
U$56  [GND0]  38.61,9.91 90 bottom
U$57  [GND0]  41.15,9.91 90 bottom
U$58  [VIN0]  43.69,9.91 90 bottom
U$59  [A00]  48.77,9.91 90 bottom
U$60  [A10]  51.31,9.91 90 bottom
U$61  [A20]  53.85,9.91 90 bottom
U$62  [A30]  56.39,9.91 90 bottom
U$63  [A40]  58.93,9.91 90 bottom
U$64  [A50]  61.47,9.91 90 bottom
U$65  [0#HW_TX0]  61.47,57.15 90 bottom
U$66  [1#HW_RX0]  58.93,57.15 90 bottom
U$67  [RESET0]  91.19,9.91 90 top
U$68  [3#GPIOA100]  53.85,57.15 90 bottom
U$69  [GPIOA100]  50.61,23.75 180 bottom
U$70  [4#RTC_PWR_KEY0]  51.31,57.15 90 bottom
U$71  [60]  46.23,57.15 90 bottom
U$72  [7#GPIOA70]  43.69,57.15 90 bottom
U$73  [8#SW_TX0]  39.88,57.15 90 bottom
U$74  [9#SW_RX0]  37.34,57.15 90 bottom
U$75  [10##CS#0]  34.8,57.15 90 bottom
U$76  [11#COPI0]  32.26,57.15 90 bottom
U$77  [12#CIPO0]  29.72,57.15 90 bottom
U$78  [13#SCK0]  27.18,57.15 90 bottom
U$79  [GND0]  24.64,53.59 90 bottom
U$80  [AREF0]  22.1,57.15 90 bottom
U$81  [SDA0]  19.56,57.15 90 bottom
U$82  [SCL0]  17.02,57.15 90 bottom
U$83  [U0#TXO0]  8.76,47.5 180 bottom
U$84  [U0#RXI0]  8.83,44.96 180 bottom
U$85  [3V30]  8.83,42.42 180 bottom
U$86  [GND0]  8.83,37.34 180 bottom
U$87  [3V30]  8.83,28.45 180 bottom
U$88  [GND0]  8.83,25.91 180 bottom
U$89  [GPIOC80]  8.83,23.37 180 bottom
U$90  [GPIOC70]  8.83,20.83 180 bottom
U$91  [GPIOC60]  8.83,18.29 180 bottom
U$92  [GPIOA100]  14.99,15.75 180 bottom
U$93  [GPIOA00]  58.99,15.75 0 top
U$94  [GPIOA10]  59.25,18.29 0 top
U$95  [GPIOA60]  8.83,13.21 180 bottom
U$96  [D30]  40.83,22.73 180 bottom
U$97  [#LED#0]  58.55,24.51 180 bottom
U$98  [#MEAS#0]  37.59,16.26 180 bottom
U$99  [PWR0]  57.85,15.11 90 top
U$100  [WIFI_SHIELD0]  20.83,34.8 180 bottom
U$101  [DA162000]  20.83,37.46 180 bottom
U$102  [GPIOA20]  59.05,20.83 0 top
U$103  [GPIOA30]  59.05,23.37 0 top
U$104  [DA16200_GPIO0]  16.38,19.56 90 top
U$105  [DA16200_PROG0]  15.11,43.69 90 top
U$106  [HEADER0]  40.83,24.77 180 bottom
U$107  [WIFI_SHIELD0]  32.26,25.91 90 top
U$108  [DA162000]  34.92,25.91 90 top
U$109  [2#GPIOA110]  56.39,57.15 90 top
U$110  [3V30]  93.73,9.91 90 top
U$111  [5V0]  96.27,9.91 90 top
U$112  [GND0]  98.81,9.91 90 top
U$113  [GND0]  101.35,9.91 90 top
U$114  [GPIOA10]  44.13,16.07 180 bottom
U$115  [GPIOA00]  55.75,16.07 180 bottom
U$116  [GPIOA20]  55.75,19.88 180 bottom
U$117  [GPIOA30]  43.94,19.88 180 bottom
U$118  [HEADER0]  49.53,17.14 180 bottom
U$119  [HEADER0]  49.53,20.89 180 bottom
U$120  [HEADER0]  61.02,20.89 180 bottom
U$121  [HEADER0]  61.09,17.08 180 bottom
U$122  [D100]  55.75,18.86 180 bottom
U$123  [D110]  49.53,15.05 180 bottom
U$124  [D120]  55.75,15.05 180 bottom
U$125  [D130]  49.53,18.86 180 bottom
U$126  [VIN0]  103.89,9.91 90 top
U$127  [A00]  108.97,9.91 90 top
U$128  [A10]  111.51,9.91 90 top
U$129  [A20]  114.05,9.91 90 top
U$130  [A30]  116.59,9.91 90 top
U$131  [A40]  119.13,9.91 90 top
U$132  [A50]  121.67,9.91 90 top
U$133  [0#HW_TX0]  121.67,57.15 90 top
U$134  [1#HW_RX0]  119.13,57.15 90 top
U$135  [7#GPIOA70]  103.89,57.15 90 top
U$136  [10##CS#0]  95,57.15 90 top
U$137  [11#COPI0]  92.46,57.15 90 top
U$138  [12#CIPO0]  89.92,57.15 90 top
U$139  [13#SCK0]  87.38,57.15 90 top
U$140  [GND0]  84.84,53.59 90 top
U$141  [AREF0]  82.3,57.15 90 top
U$142  [SDA0]  79.76,57.15 90 top
U$143  [SCL0]  77.22,57.15 90 top
U$144  [GPIOA70]  81.03,44.45 0 top
U$145  [GPIOC80]  69.02,23.37 0 top
U$146  [GPIOC70]  69.02,20.83 0 top
U$147  [GPIOC60]  69.02,18.29 0 top
U$148  [GPIOA100]  75.18,15.75 0 top
U$149  [U0#TXO0]  68.96,47.5 0 top
U$150  [U0#RXI0]  69.02,44.96 0 top
U$151  [RESET_0]  81.15,16.38 0 top
U$152  [3V30]  69.02,42.42 0 top
U$153  [GND0]  69.02,37.34 0 top
U$154  [GND0]  69.02,25.91 0 top
U$155  [3V30]  69.02,28.45 0 top
U$156  [HW0]  109.92,44.32 0 top
U$157  [SW0]  104.33,44.26 0 top
U$158  [GPIOA60]  69.02,13.21 0 top
U$159  [8#SW_TX0]  100.08,57.15 90 top
U$160  [9#SW_RX0]  97.54,57.15 90 top
U$161  [60]  106.43,57.15 90 top
U$162  [IOREF0]  88.65,9.91 90 bottom
U$163  [RESET0]  91.19,9.91 90 bottom
U$164  [3V30]  93.73,9.91 90 bottom
U$165  [5V0]  96.27,9.91 90 bottom
U$166  [GND0]  98.81,9.91 90 bottom
U$167  [GND0]  101.35,9.91 90 bottom
U$168  [VIN0]  103.89,9.91 90 bottom
U$169  [A00]  108.97,9.91 90 bottom
U$170  [A10]  111.51,9.91 90 bottom
U$171  [A20]  114.05,9.91 90 bottom
U$172  [A30]  116.59,9.91 90 bottom
U$173  [A40]  119.13,9.91 90 bottom
U$174  [A50]  121.67,9.91 90 bottom
U$175  [0#HW_TX0]  121.67,57.15 90 bottom
U$176  [1#HW_RX0]  119.13,57.15 90 bottom
U$177  [60]  106.43,57.15 90 bottom
U$178  [7#GPIOA70]  103.89,57.15 90 bottom
U$179  [8#SW_TX0]  100.08,57.15 90 bottom
U$180  [9#SW_RX0]  97.54,57.15 90 bottom
U$181  [10##CS#0]  95,57.15 90 bottom
U$182  [11#COPI0]  92.46,57.15 90 bottom
U$183  [12#CIPO0]  89.92,57.15 90 bottom
U$184  [13#SCK0]  87.38,57.15 90 bottom
U$185  [GND0]  84.84,53.59 90 bottom
U$186  [AREF0]  82.3,57.15 90 bottom
U$187  [SDA0]  79.76,57.15 90 bottom
U$188  [SCL0]  77.22,57.15 90 bottom
U$189  [U0#TXO0]  68.96,47.5 180 bottom
U$190  [U0#RXI0]  69.02,44.96 180 bottom
U$191  [3V30]  69.02,42.42 180 bottom
U$192  [GND0]  69.02,37.34 180 bottom
U$193  [3V30]  69.02,28.45 180 bottom
U$194  [GND0]  69.02,25.91 180 bottom
U$195  [GPIOC80]  69.02,23.37 180 bottom
U$196  [GPIOC70]  69.02,20.83 180 bottom
U$197  [GPIOC60]  69.02,18.29 180 bottom
U$198  [GPIOA100]  75.18,15.75 180 bottom
U$199  [GPIOA60]  69.02,13.21 180 bottom
U$200  [#LED#0]  118.75,24.51 180 bottom
U$201  [#MEAS#0]  97.79,16.26 180 bottom
U$202  [PWR0]  118.05,15.11 90 top
U$203  [DA16200_GPIO0]  76.58,19.56 90 top
U$204  [DA16200_PROG0]  75.31,43.69 90 top
U$205  [3#GPIOA100]  114.05,57.15 90 top
U$206  [3#GPIOA100]  114.05,57.15 90 bottom
U$207  [GPIOA100]  110.81,23.75 180 bottom
U$208  [D30]  101.03,22.73 180 bottom
U$209  [HEADER0]  101.03,24.77 180 bottom
U$210  [WIFI_SHIELD0]  92.46,25.91 90 top
U$211  [DA162000]  95.12,25.91 90 top
U$212  [WIFI_SHIELD0]  81.03,34.8 180 bottom
U$213  [DA162000]  81.03,37.46 180 bottom
U$214  [#I2C#0]  84.39,49.02 90 bottom
U$215  [GPIOA10]  104.33,16.07 180 bottom
U$216  [GPIOA00]  115.95,16.07 180 bottom
U$217  [GPIOA20]  115.95,19.88 180 bottom
U$218  [GPIOA30]  104.14,19.88 180 bottom
U$219  [HEADER0]  109.73,17.14 180 bottom
U$220  [HEADER0]  109.73,20.89 180 bottom
U$221  [HEADER0]  121.22,20.89 180 bottom
U$222  [HEADER0]  121.29,17.08 180 bottom
U$223  [D100]  115.95,18.86 180 bottom
U$224  [D110]  109.73,15.05 180 bottom
U$225  [D120]  115.95,15.05 180 bottom
U$226  [D130]  109.73,18.86 180 bottom
U$227  [GPIOA00]  119.19,15.75 0 top
U$228  [GPIOA10]  119.44,18.29 0 top
U$229  [GPIOA20]  119.25,20.83 0 top
U$230  [GPIOA30]  119.25,23.37 0 top
U$231  [4#RTC_PWR_KEY0]  111.51,57.15 90 top
U$232  [5#WAKE10]  108.97,57.21 90 top
U$233  [5#WAKE10]  108.97,57.21 90 bottom
U$234  [4#RTC_PWR_KEY0]  111.51,57.15 90 bottom
U$235  [WAKE20]  69.02,10.67 0 top
U$236  [WAKE20]  69.02,10.67 180 bottom
U$237  [2#GPIOA110]  116.59,57.15 90 bottom
U$238  [2#GPIOA110]  116.59,57.15 90 top
U$239  [IOREF0]  148.84,9.91 90 top
U$240  [RESET0]  151.38,9.91 90 top
U$241  [3V30]  153.92,9.91 90 top
U$242  [5V0]  156.46,9.91 90 top
U$243  [GND0]  159,9.91 90 top
U$244  [GND0]  161.54,9.91 90 top
U$245  [VIN0]  164.08,9.91 90 top
U$246  [A00]  169.16,9.91 90 top
U$247  [A10]  171.7,9.91 90 top
U$248  [A20]  174.24,9.91 90 top
U$249  [A30]  176.78,9.91 90 top
U$250  [A40]  179.32,9.91 90 top
U$251  [A50]  181.86,9.91 90 top
U$252  [0#HW_TX0]  181.86,57.15 90 top
U$253  [1#HW_RX0]  179.32,57.15 90 top
U$254  [7#GPIOA70]  164.08,57.15 90 top
U$255  [10##CS#0]  155.19,57.15 90 top
U$256  [11#COPI0]  152.65,57.15 90 top
U$257  [12#CIPO0]  150.11,57.15 90 top
U$258  [13#SCK0]  147.57,57.15 90 top
U$259  [GND0]  145.03,53.59 90 top
U$260  [AREF0]  142.49,57.15 90 top
U$261  [SDA0]  139.95,57.15 90 top
U$262  [SCL0]  137.41,57.15 90 top
U$263  [GPIOA70]  141.22,44.45 0 top
U$264  [GPIOC80]  129.22,23.37 0 top
U$265  [GPIOC70]  129.22,20.83 0 top
U$266  [GPIOC60]  129.22,18.29 0 top
U$267  [GPIOA100]  135.38,15.75 0 top
U$268  [U0#TXO0]  129.16,47.5 0 top
U$269  [U0#RXI0]  129.22,44.96 0 top
U$270  [RESET_0]  141.35,16.38 0 top
U$271  [3V30]  129.22,42.42 0 top
U$272  [GND0]  129.22,37.34 0 top
U$273  [GND0]  129.22,25.91 0 top
U$274  [3V30]  129.22,28.45 0 top
U$275  [HW0]  170.12,44.32 0 top
U$276  [SW0]  164.53,44.26 0 top
U$277  [GPIOA60]  129.22,13.21 0 top
U$278  [8#SW_TX0]  160.27,57.15 90 top
U$279  [9#SW_RX0]  157.73,57.15 90 top
U$280  [60]  166.62,57.15 90 top
U$281  [IOREF0]  148.84,9.91 90 bottom
U$282  [RESET0]  151.38,9.91 90 bottom
U$283  [3V30]  153.92,9.91 90 bottom
U$284  [5V0]  156.46,9.91 90 bottom
U$285  [GND0]  159,9.91 90 bottom
U$286  [GND0]  161.54,9.91 90 bottom
U$287  [VIN0]  164.08,9.91 90 bottom
U$288  [A00]  169.16,9.91 90 bottom
U$289  [A10]  171.7,9.91 90 bottom
U$290  [A20]  174.24,9.91 90 bottom
U$291  [A30]  176.78,9.91 90 bottom
U$292  [A40]  179.32,9.91 90 bottom
U$293  [A50]  181.86,9.91 90 bottom
U$294  [0#HW_TX0]  181.86,57.15 90 bottom
U$295  [1#HW_RX0]  179.32,57.15 90 bottom
U$296  [60]  166.62,57.15 90 bottom
U$297  [7#GPIOA70]  164.08,57.15 90 bottom
U$298  [8#SW_TX0]  160.27,57.15 90 bottom
U$299  [9#SW_RX0]  157.73,57.15 90 bottom
U$300  [10##CS#0]  155.19,57.15 90 bottom
U$301  [11#COPI0]  152.65,57.15 90 bottom
U$302  [12#CIPO0]  150.11,57.15 90 bottom
U$303  [13#SCK0]  147.57,57.15 90 bottom
U$304  [GND0]  145.03,53.59 90 bottom
U$305  [AREF0]  142.49,57.15 90 bottom
U$306  [SDA0]  139.95,57.15 90 bottom
U$307  [SCL0]  137.41,57.15 90 bottom
U$308  [U0#TXO0]  129.16,47.5 180 bottom
U$309  [U0#RXI0]  129.22,44.96 180 bottom
U$310  [3V30]  129.22,42.42 180 bottom
U$311  [GND0]  129.22,37.34 180 bottom
U$312  [3V30]  129.22,28.45 180 bottom
U$313  [GND0]  129.22,25.91 180 bottom
U$314  [GPIOC80]  129.22,23.37 180 bottom
U$315  [GPIOC70]  129.22,20.83 180 bottom
U$316  [GPIOC60]  129.22,18.29 180 bottom
U$317  [GPIOA100]  135.38,15.75 180 bottom
U$318  [GPIOA60]  129.22,13.21 180 bottom
U$319  [#LED#0]  178.94,24.51 180 bottom
U$320  [#MEAS#0]  157.99,16.26 180 bottom
U$321  [PWR0]  178.24,15.11 90 top
U$322  [DA16200_GPIO0]  136.78,19.56 90 top
U$323  [DA16200_PROG0]  135.51,43.69 90 top
U$324  [3#GPIOA100]  174.24,57.15 90 top
U$325  [3#GPIOA100]  174.24,57.15 90 bottom
U$326  [GPIOA100]  171.01,23.75 180 bottom
U$327  [D30]  161.23,22.73 180 bottom
U$328  [HEADER0]  161.23,24.77 180 bottom
U$329  [WIFI_SHIELD0]  152.65,25.91 90 top
U$330  [DA162000]  155.32,25.91 90 top
U$331  [WIFI_SHIELD0]  141.22,34.8 180 bottom
U$332  [DA162000]  141.22,37.46 180 bottom
U$333  [#I2C#0]  144.59,49.02 90 bottom
U$334  [GPIOA10]  164.53,16.07 180 bottom
U$335  [GPIOA00]  176.15,16.07 180 bottom
U$336  [GPIOA20]  176.15,19.88 180 bottom
U$337  [GPIOA30]  164.34,19.88 180 bottom
U$338  [HEADER0]  169.93,17.14 180 bottom
U$339  [HEADER0]  169.93,20.89 180 bottom
U$340  [HEADER0]  181.42,20.89 180 bottom
U$341  [HEADER0]  181.48,17.08 180 bottom
U$342  [D100]  176.15,18.86 180 bottom
U$343  [D110]  169.93,15.05 180 bottom
U$344  [D120]  176.15,15.05 180 bottom
U$345  [D130]  169.93,18.86 180 bottom
U$346  [GPIOA00]  179.39,15.75 0 top
U$347  [GPIOA10]  179.64,18.29 0 top
U$348  [GPIOA20]  179.45,20.83 0 top
U$349  [GPIOA30]  179.45,23.37 0 top
U$350  [4#RTC_PWR_KEY0]  171.7,57.15 90 top
U$351  [5#WAKE10]  169.16,57.21 90 top
U$352  [5#WAKE10]  169.16,57.21 90 bottom
U$353  [4#RTC_PWR_KEY0]  171.7,57.15 90 bottom
U$354  [WAKE20]  129.22,10.67 0 top
U$355  [WAKE20]  129.22,10.67 180 bottom
U$356  [2#GPIOA110]  176.78,57.15 90 bottom
U$357  [2#GPIOA110]  176.78,57.15 90 top
U$358  [IOREF0]  28.45,63.75 90 top
U$359  [RESET0]  30.99,63.75 90 top
U$360  [3V30]  33.53,63.75 90 top
U$361  [5V0]  36.07,63.75 90 top
U$362  [GND0]  38.61,63.75 90 top
U$363  [GND0]  41.15,63.75 90 top
U$364  [VIN0]  43.69,63.75 90 top
U$365  [A00]  48.77,63.75 90 top
U$366  [A10]  51.31,63.75 90 top
U$367  [A20]  53.85,63.75 90 top
U$368  [A30]  56.39,63.75 90 top
U$369  [A40]  58.93,63.75 90 top
U$370  [A50]  61.47,63.75 90 top
U$371  [0#HW_TX0]  61.47,111 90 top
U$372  [1#HW_RX0]  58.93,111 90 top
U$373  [7#GPIOA70]  43.69,111 90 top
U$374  [10##CS#0]  34.8,111 90 top
U$375  [11#COPI0]  32.26,111 90 top
U$376  [12#CIPO0]  29.72,111 90 top
U$377  [13#SCK0]  27.18,111 90 top
U$378  [GND0]  24.64,107.44 90 top
U$379  [AREF0]  22.1,111 90 top
U$380  [SDA0]  19.56,111 90 top
U$381  [SCL0]  17.02,111 90 top
U$382  [GPIOA70]  20.83,98.3 0 top
U$383  [GPIOC80]  8.83,77.22 0 top
U$384  [GPIOC70]  8.83,74.68 0 top
U$385  [GPIOC60]  8.83,72.14 0 top
U$386  [GPIOA100]  14.99,69.6 0 top
U$387  [U0#TXO0]  8.76,101.35 0 top
U$388  [U0#RXI0]  8.83,98.81 0 top
U$389  [RESET_0]  20.95,70.23 0 top
U$390  [3V30]  8.83,96.27 0 top
U$391  [GND0]  8.83,91.19 0 top
U$392  [GND0]  8.83,79.76 0 top
U$393  [3V30]  8.83,82.3 0 top
U$394  [HW0]  49.72,98.17 0 top
U$395  [SW0]  44.13,98.11 0 top
U$396  [GPIOA60]  8.83,67.06 0 top
U$397  [8#SW_TX0]  39.88,111 90 top
U$398  [9#SW_RX0]  37.34,111 90 top
U$399  [60]  46.23,111 90 top
U$400  [IOREF0]  28.45,63.75 90 bottom
U$401  [RESET0]  30.99,63.75 90 bottom
U$402  [3V30]  33.53,63.75 90 bottom
U$403  [5V0]  36.07,63.75 90 bottom
U$404  [GND0]  38.61,63.75 90 bottom
U$405  [GND0]  41.15,63.75 90 bottom
U$406  [VIN0]  43.69,63.75 90 bottom
U$407  [A00]  48.77,63.75 90 bottom
U$408  [A10]  51.31,63.75 90 bottom
U$409  [A20]  53.85,63.75 90 bottom
U$410  [A30]  56.39,63.75 90 bottom
U$411  [A40]  58.93,63.75 90 bottom
U$412  [A50]  61.47,63.75 90 bottom
U$413  [0#HW_TX0]  61.47,111 90 bottom
U$414  [1#HW_RX0]  58.93,111 90 bottom
U$415  [60]  46.23,111 90 bottom
U$416  [7#GPIOA70]  43.69,111 90 bottom
U$417  [8#SW_TX0]  39.88,111 90 bottom
U$418  [9#SW_RX0]  37.34,111 90 bottom
U$419  [10##CS#0]  34.8,111 90 bottom
U$420  [11#COPI0]  32.26,111 90 bottom
U$421  [12#CIPO0]  29.72,111 90 bottom
U$422  [13#SCK0]  27.18,111 90 bottom
U$423  [GND0]  24.64,107.44 90 bottom
U$424  [AREF0]  22.1,111 90 bottom
U$425  [SDA0]  19.56,111 90 bottom
U$426  [SCL0]  17.02,111 90 bottom
U$427  [U0#TXO0]  8.76,101.35 180 bottom
U$428  [U0#RXI0]  8.83,98.81 180 bottom
U$429  [3V30]  8.83,96.27 180 bottom
U$430  [GND0]  8.83,91.19 180 bottom
U$431  [3V30]  8.83,82.3 180 bottom
U$432  [GND0]  8.83,79.76 180 bottom
U$433  [GPIOC80]  8.83,77.22 180 bottom
U$434  [GPIOC70]  8.83,74.68 180 bottom
U$435  [GPIOC60]  8.83,72.14 180 bottom
U$436  [GPIOA100]  14.99,69.6 180 bottom
U$437  [GPIOA60]  8.83,67.06 180 bottom
U$438  [#LED#0]  58.55,78.36 180 bottom
U$439  [#MEAS#0]  37.59,70.1 180 bottom
U$440  [PWR0]  57.85,68.96 90 top
U$441  [DA16200_GPIO0]  16.38,73.41 90 top
U$442  [DA16200_PROG0]  15.11,97.54 90 top
U$443  [3#GPIOA100]  53.85,111 90 top
U$444  [3#GPIOA100]  53.85,111 90 bottom
U$445  [GPIOA100]  50.61,77.6 180 bottom
U$446  [D30]  40.83,76.58 180 bottom
U$447  [HEADER0]  40.83,78.61 180 bottom
U$448  [WIFI_SHIELD0]  32.26,79.76 90 top
U$449  [DA162000]  34.92,79.76 90 top
U$450  [WIFI_SHIELD0]  20.83,88.65 180 bottom
U$451  [DA162000]  20.83,91.31 180 bottom
U$452  [#I2C#0]  24.19,102.87 90 bottom
U$453  [GPIOA10]  44.13,69.91 180 bottom
U$454  [GPIOA00]  55.75,69.91 180 bottom
U$455  [GPIOA20]  55.75,73.72 180 bottom
U$456  [GPIOA30]  43.94,73.72 180 bottom
U$457  [HEADER0]  49.53,70.99 180 bottom
U$458  [HEADER0]  49.53,74.74 180 bottom
U$459  [HEADER0]  61.02,74.74 180 bottom
U$460  [HEADER0]  61.09,70.93 180 bottom
U$461  [D100]  55.75,72.71 180 bottom
U$462  [D110]  49.53,68.9 180 bottom
U$463  [D120]  55.75,68.9 180 bottom
U$464  [D130]  49.53,72.71 180 bottom
U$465  [GPIOA00]  58.99,69.6 0 top
U$466  [GPIOA10]  59.25,72.14 0 top
U$467  [GPIOA20]  59.05,74.68 0 top
U$468  [GPIOA30]  59.05,77.22 0 top
U$469  [4#RTC_PWR_KEY0]  51.31,111 90 top
U$470  [5#WAKE10]  48.77,111.06 90 top
U$471  [5#WAKE10]  48.77,111.06 90 bottom
U$472  [4#RTC_PWR_KEY0]  51.31,111 90 bottom
U$473  [WAKE20]  8.83,64.52 0 top
U$474  [WAKE20]  8.83,64.52 180 bottom
U$475  [2#GPIOA110]  56.39,111 90 bottom
U$476  [2#GPIOA110]  56.39,111 90 top
U$477  [IOREF0]  88.65,63.75 90 top
U$478  [RESET0]  91.19,63.75 90 top
U$479  [3V30]  93.73,63.75 90 top
U$480  [5V0]  96.27,63.75 90 top
U$481  [GND0]  98.81,63.75 90 top
U$482  [GND0]  101.35,63.75 90 top
U$483  [VIN0]  103.89,63.75 90 top
U$484  [A00]  108.97,63.75 90 top
U$485  [A10]  111.51,63.75 90 top
U$486  [A20]  114.05,63.75 90 top
U$487  [A30]  116.59,63.75 90 top
U$488  [A40]  119.13,63.75 90 top
U$489  [A50]  121.67,63.75 90 top
U$490  [0#HW_TX0]  121.67,111 90 top
U$491  [1#HW_RX0]  119.13,111 90 top
U$492  [7#GPIOA70]  103.89,111 90 top
U$493  [10##CS#0]  95,111 90 top
U$494  [11#COPI0]  92.46,111 90 top
U$495  [12#CIPO0]  89.92,111 90 top
U$496  [13#SCK0]  87.38,111 90 top
U$497  [GND0]  84.84,107.44 90 top
U$498  [AREF0]  82.3,111 90 top
U$499  [SDA0]  79.76,111 90 top
U$500  [SCL0]  77.22,111 90 top
U$501  [GPIOA70]  81.03,98.3 0 top
U$502  [GPIOC80]  69.02,77.22 0 top
U$503  [GPIOC70]  69.02,74.68 0 top
U$504  [GPIOC60]  69.02,72.14 0 top
U$505  [GPIOA100]  75.18,69.6 0 top
U$506  [U0#TXO0]  68.96,101.35 0 top
U$507  [U0#RXI0]  69.02,98.81 0 top
U$508  [RESET_0]  81.15,70.23 0 top
U$509  [3V30]  69.02,96.27 0 top
U$510  [GND0]  69.02,91.19 0 top
U$511  [GND0]  69.02,79.76 0 top
U$512  [3V30]  69.02,82.3 0 top
U$513  [HW0]  109.92,98.17 0 top
U$514  [SW0]  104.33,98.11 0 top
U$515  [GPIOA60]  69.02,67.06 0 top
U$516  [8#SW_TX0]  100.08,111 90 top
U$517  [9#SW_RX0]  97.54,111 90 top
U$518  [60]  106.43,111 90 top
U$519  [IOREF0]  88.65,63.75 90 bottom
U$520  [RESET0]  91.19,63.75 90 bottom
U$521  [3V30]  93.73,63.75 90 bottom
U$522  [5V0]  96.27,63.75 90 bottom
U$523  [GND0]  98.81,63.75 90 bottom
U$524  [GND0]  101.35,63.75 90 bottom
U$525  [VIN0]  103.89,63.75 90 bottom
U$526  [A00]  108.97,63.75 90 bottom
U$527  [A10]  111.51,63.75 90 bottom
U$528  [A20]  114.05,63.75 90 bottom
U$529  [A30]  116.59,63.75 90 bottom
U$530  [A40]  119.13,63.75 90 bottom
U$531  [A50]  121.67,63.75 90 bottom
U$532  [0#HW_TX0]  121.67,111 90 bottom
U$533  [1#HW_RX0]  119.13,111 90 bottom
U$534  [60]  106.43,111 90 bottom
U$535  [7#GPIOA70]  103.89,111 90 bottom
U$536  [8#SW_TX0]  100.08,111 90 bottom
U$537  [9#SW_RX0]  97.54,111 90 bottom
U$538  [10##CS#0]  95,111 90 bottom
U$539  [11#COPI0]  92.46,111 90 bottom
U$540  [12#CIPO0]  89.92,111 90 bottom
U$541  [13#SCK0]  87.38,111 90 bottom
U$542  [GND0]  84.84,107.44 90 bottom
U$543  [AREF0]  82.3,111 90 bottom
U$544  [SDA0]  79.76,111 90 bottom
U$545  [SCL0]  77.22,111 90 bottom
U$546  [U0#TXO0]  68.96,101.35 180 bottom
U$547  [U0#RXI0]  69.02,98.81 180 bottom
U$548  [3V30]  69.02,96.27 180 bottom
U$549  [GND0]  69.02,91.19 180 bottom
U$550  [3V30]  69.02,82.3 180 bottom
U$551  [GND0]  69.02,79.76 180 bottom
U$552  [GPIOC80]  69.02,77.22 180 bottom
U$553  [GPIOC70]  69.02,74.68 180 bottom
U$554  [GPIOC60]  69.02,72.14 180 bottom
U$555  [GPIOA100]  75.18,69.6 180 bottom
U$556  [GPIOA60]  69.02,67.06 180 bottom
U$557  [#LED#0]  118.75,78.36 180 bottom
U$558  [#MEAS#0]  97.79,70.1 180 bottom
U$559  [PWR0]  118.05,68.96 90 top
U$560  [DA16200_GPIO0]  76.58,73.41 90 top
U$561  [DA16200_PROG0]  75.31,97.54 90 top
U$562  [3#GPIOA100]  114.05,111 90 top
U$563  [3#GPIOA100]  114.05,111 90 bottom
U$564  [GPIOA100]  110.81,77.6 180 bottom
U$565  [D30]  101.03,76.58 180 bottom
U$566  [HEADER0]  101.03,78.61 180 bottom
U$567  [WIFI_SHIELD0]  92.46,79.76 90 top
U$568  [DA162000]  95.12,79.76 90 top
U$569  [WIFI_SHIELD0]  81.03,88.65 180 bottom
U$570  [DA162000]  81.03,91.31 180 bottom
U$571  [#I2C#0]  84.39,102.87 90 bottom
U$572  [GPIOA10]  104.33,69.91 180 bottom
U$573  [GPIOA00]  115.95,69.91 180 bottom
U$574  [GPIOA20]  115.95,73.72 180 bottom
U$575  [GPIOA30]  104.14,73.72 180 bottom
U$576  [HEADER0]  109.73,70.99 180 bottom
U$577  [HEADER0]  109.73,74.74 180 bottom
U$578  [HEADER0]  121.22,74.74 180 bottom
U$579  [HEADER0]  121.29,70.93 180 bottom
U$580  [D100]  115.95,72.71 180 bottom
U$581  [D110]  109.73,68.9 180 bottom
U$582  [D120]  115.95,68.9 180 bottom
U$583  [D130]  109.73,72.71 180 bottom
U$584  [GPIOA00]  119.19,69.6 0 top
U$585  [GPIOA10]  119.44,72.14 0 top
U$586  [GPIOA20]  119.25,74.68 0 top
U$587  [GPIOA30]  119.25,77.22 0 top
U$588  [4#RTC_PWR_KEY0]  111.51,111 90 top
U$589  [5#WAKE10]  108.97,111.06 90 top
U$590  [5#WAKE10]  108.97,111.06 90 bottom
U$591  [4#RTC_PWR_KEY0]  111.51,111 90 bottom
U$592  [WAKE20]  69.02,64.52 0 top
U$593  [WAKE20]  69.02,64.52 180 bottom
U$594  [2#GPIOA110]  116.59,111 90 bottom
U$595  [2#GPIOA110]  116.59,111 90 top
U$596  [IOREF0]  148.84,63.75 90 top
U$597  [RESET0]  151.38,63.75 90 top
U$598  [3V30]  153.92,63.75 90 top
U$599  [5V0]  156.46,63.75 90 top
U$600  [GND0]  159,63.75 90 top
U$601  [GND0]  161.54,63.75 90 top
U$602  [VIN0]  164.08,63.75 90 top
U$603  [A00]  169.16,63.75 90 top
U$604  [A10]  171.7,63.75 90 top
U$605  [A20]  174.24,63.75 90 top
U$606  [A30]  176.78,63.75 90 top
U$607  [A40]  179.32,63.75 90 top
U$608  [A50]  181.86,63.75 90 top
U$609  [0#HW_TX0]  181.86,111 90 top
U$610  [1#HW_RX0]  179.32,111 90 top
U$611  [7#GPIOA70]  164.08,111 90 top
U$612  [10##CS#0]  155.19,111 90 top
U$613  [11#COPI0]  152.65,111 90 top
U$614  [12#CIPO0]  150.11,111 90 top
U$615  [13#SCK0]  147.57,111 90 top
U$616  [GND0]  145.03,107.44 90 top
U$617  [AREF0]  142.49,111 90 top
U$618  [SDA0]  139.95,111 90 top
U$619  [SCL0]  137.41,111 90 top
U$620  [GPIOA70]  141.22,98.3 0 top
U$621  [GPIOC80]  129.22,77.22 0 top
U$622  [GPIOC70]  129.22,74.68 0 top
U$623  [GPIOC60]  129.22,72.14 0 top
U$624  [GPIOA100]  135.38,69.6 0 top
U$625  [U0#TXO0]  129.16,101.35 0 top
U$626  [U0#RXI0]  129.22,98.81 0 top
U$627  [RESET_0]  141.35,70.23 0 top
U$628  [3V30]  129.22,96.27 0 top
U$629  [GND0]  129.22,91.19 0 top
U$630  [GND0]  129.22,79.76 0 top
U$631  [3V30]  129.22,82.3 0 top
U$632  [HW0]  170.12,98.17 0 top
U$633  [SW0]  164.53,98.11 0 top
U$634  [GPIOA60]  129.22,67.06 0 top
U$635  [8#SW_TX0]  160.27,111 90 top
U$636  [9#SW_RX0]  157.73,111 90 top
U$637  [60]  166.62,111 90 top
U$638  [IOREF0]  148.84,63.75 90 bottom
U$639  [RESET0]  151.38,63.75 90 bottom
U$640  [3V30]  153.92,63.75 90 bottom
U$641  [5V0]  156.46,63.75 90 bottom
U$642  [GND0]  159,63.75 90 bottom
U$643  [GND0]  161.54,63.75 90 bottom
U$644  [VIN0]  164.08,63.75 90 bottom
U$645  [A00]  169.16,63.75 90 bottom
U$646  [A10]  171.7,63.75 90 bottom
U$647  [A20]  174.24,63.75 90 bottom
U$648  [A30]  176.78,63.75 90 bottom
U$649  [A40]  179.32,63.75 90 bottom
U$650  [A50]  181.86,63.75 90 bottom
U$651  [0#HW_TX0]  181.86,111 90 bottom
U$652  [1#HW_RX0]  179.32,111 90 bottom
U$653  [60]  166.62,111 90 bottom
U$654  [7#GPIOA70]  164.08,111 90 bottom
U$655  [8#SW_TX0]  160.27,111 90 bottom
U$656  [9#SW_RX0]  157.73,111 90 bottom
U$657  [10##CS#0]  155.19,111 90 bottom
U$658  [11#COPI0]  152.65,111 90 bottom
U$659  [12#CIPO0]  150.11,111 90 bottom
U$660  [13#SCK0]  147.57,111 90 bottom
U$661  [GND0]  145.03,107.44 90 bottom
U$662  [AREF0]  142.49,111 90 bottom
U$663  [SDA0]  139.95,111 90 bottom
U$664  [SCL0]  137.41,111 90 bottom
U$665  [U0#TXO0]  129.16,101.35 180 bottom
U$666  [U0#RXI0]  129.22,98.81 180 bottom
U$667  [3V30]  129.22,96.27 180 bottom
U$668  [GND0]  129.22,91.19 180 bottom
U$669  [3V30]  129.22,82.3 180 bottom
U$670  [GND0]  129.22,79.76 180 bottom
U$671  [GPIOC80]  129.22,77.22 180 bottom
U$672  [GPIOC70]  129.22,74.68 180 bottom
U$673  [GPIOC60]  129.22,72.14 180 bottom
U$674  [GPIOA100]  135.38,69.6 180 bottom
U$675  [GPIOA60]  129.22,67.06 180 bottom
U$676  [#LED#0]  178.94,78.36 180 bottom
U$677  [#MEAS#0]  157.99,70.1 180 bottom
U$678  [PWR0]  178.24,68.96 90 top
U$679  [DA16200_GPIO0]  136.78,73.41 90 top
U$680  [DA16200_PROG0]  135.51,97.54 90 top
U$681  [3#GPIOA100]  174.24,111 90 top
U$682  [3#GPIOA100]  174.24,111 90 bottom
U$683  [GPIOA100]  171.01,77.6 180 bottom
U$684  [D30]  161.23,76.58 180 bottom
U$685  [HEADER0]  161.23,78.61 180 bottom
U$686  [WIFI_SHIELD0]  152.65,79.76 90 top
U$687  [DA162000]  155.32,79.76 90 top
U$688  [WIFI_SHIELD0]  141.22,88.65 180 bottom
U$689  [DA162000]  141.22,91.31 180 bottom
U$690  [#I2C#0]  144.59,102.87 90 bottom
U$691  [GPIOA10]  164.53,69.91 180 bottom
U$692  [GPIOA00]  176.15,69.91 180 bottom
U$693  [GPIOA20]  176.15,73.72 180 bottom
U$694  [GPIOA30]  164.34,73.72 180 bottom
U$695  [HEADER0]  169.93,70.99 180 bottom
U$696  [HEADER0]  169.93,74.74 180 bottom
U$697  [HEADER0]  181.42,74.74 180 bottom
U$698  [HEADER0]  181.48,70.93 180 bottom
U$699  [D100]  176.15,72.71 180 bottom
U$700  [D110]  169.93,68.9 180 bottom
U$701  [D120]  176.15,68.9 180 bottom
U$702  [D130]  169.93,72.71 180 bottom
U$703  [GPIOA00]  179.39,69.6 0 top
U$704  [GPIOA10]  179.64,72.14 0 top
U$705  [GPIOA20]  179.45,74.68 0 top
U$706  [GPIOA30]  179.45,77.22 0 top
U$707  [4#RTC_PWR_KEY0]  171.7,111 90 top
U$708  [5#WAKE10]  169.16,111.06 90 top
U$709  [5#WAKE10]  169.16,111.06 90 bottom
U$710  [4#RTC_PWR_KEY0]  171.7,111 90 bottom
U$711  [WAKE20]  129.22,64.52 0 top
U$712  [WAKE20]  129.22,64.52 180 bottom
U$713  [2#GPIOA110]  176.78,111 90 bottom
U$714  [2#GPIOA110]  176.78,111 90 top

## Library data of the parts
B1-B6 = SparkFun-Boards
C1 C8 C12 C16 C20 C24 = SparkFun-Capacitors
C2 C3 C5 C7 C9 C11 C13 C15 C17 C19 C21 C23 = SparkFun-Capacitors; PROD_ID: CAP-00868
C4 C6 C10 C14 C18 C22 = SparkFun-Capacitors; PROD_ID: CAP-11015
D1-D6 = SparkFun-LED; PROD_ID: DIO-00819
E$1-E$4 FD1-FD24 LOGO1-LOGO24 = SparkFun-Aesthetics
E$5 E$6 = SparkFun-Retired
I2C I2C1-I2C5 JP1-JP36 MEAS MEAS1-MEAS5 = SparkFun-Jumpers
J1 J2 J4 J6 J7 J10-J12 J15-J17 J20-J22 J25-J27 J30 TP1-TP6 = SparkFun-Connectors
J3 J8 J13 J18 J23 J28 = SparkFun-Connectors; PROD_ID: CONN-13694; VALUE: QWIIC_RIGHT_ANGLE
J5 J9 J14 J19 J24 J29 = SparkFun-Connectors; PROD_ID: CONN-09696
R1 R16 R24 R32 R40 R48 = SparkFun-Resistors
R2-R5 R7 R8 R10-R15 R18-R23 R26-R31 R34-R39 R42-R47 = SparkFun-Resistors; PROD_ID: RES-07857
R6 R9 R17 R25 R33 R41 = SparkFun-Resistors; PROD_ID: RES-08220
S1 S4 S7 S10 S13 S16 = SparkFun-Switches; PROD_ID: SWCH-08179; SF_SKU: COM-00597
S2 S3 S5 S6 S8 S9 S11 S12 S14 S15 S17 S18 = SparkFun-Switches; PROD_ID: SWCH-14139
U1-U6 = DA16200MOD; PROD_ID: IC-16179
U$1-U$714 = output